# Altium PCB PCB-MAKEY_MAKEY_PTITTEAM_vIN.PcbDoc
Units mil, origin at the board's own origin, x right, y up, seen from the top; angles counter-clockwise.
Board outline 3500 x 1950 mil, 2 copper layers (Top Layer, Bottom Layer); 52 components, 61 nets, 161 pads, 57 vias.
Unrouted connection lines stored in the file: 10.
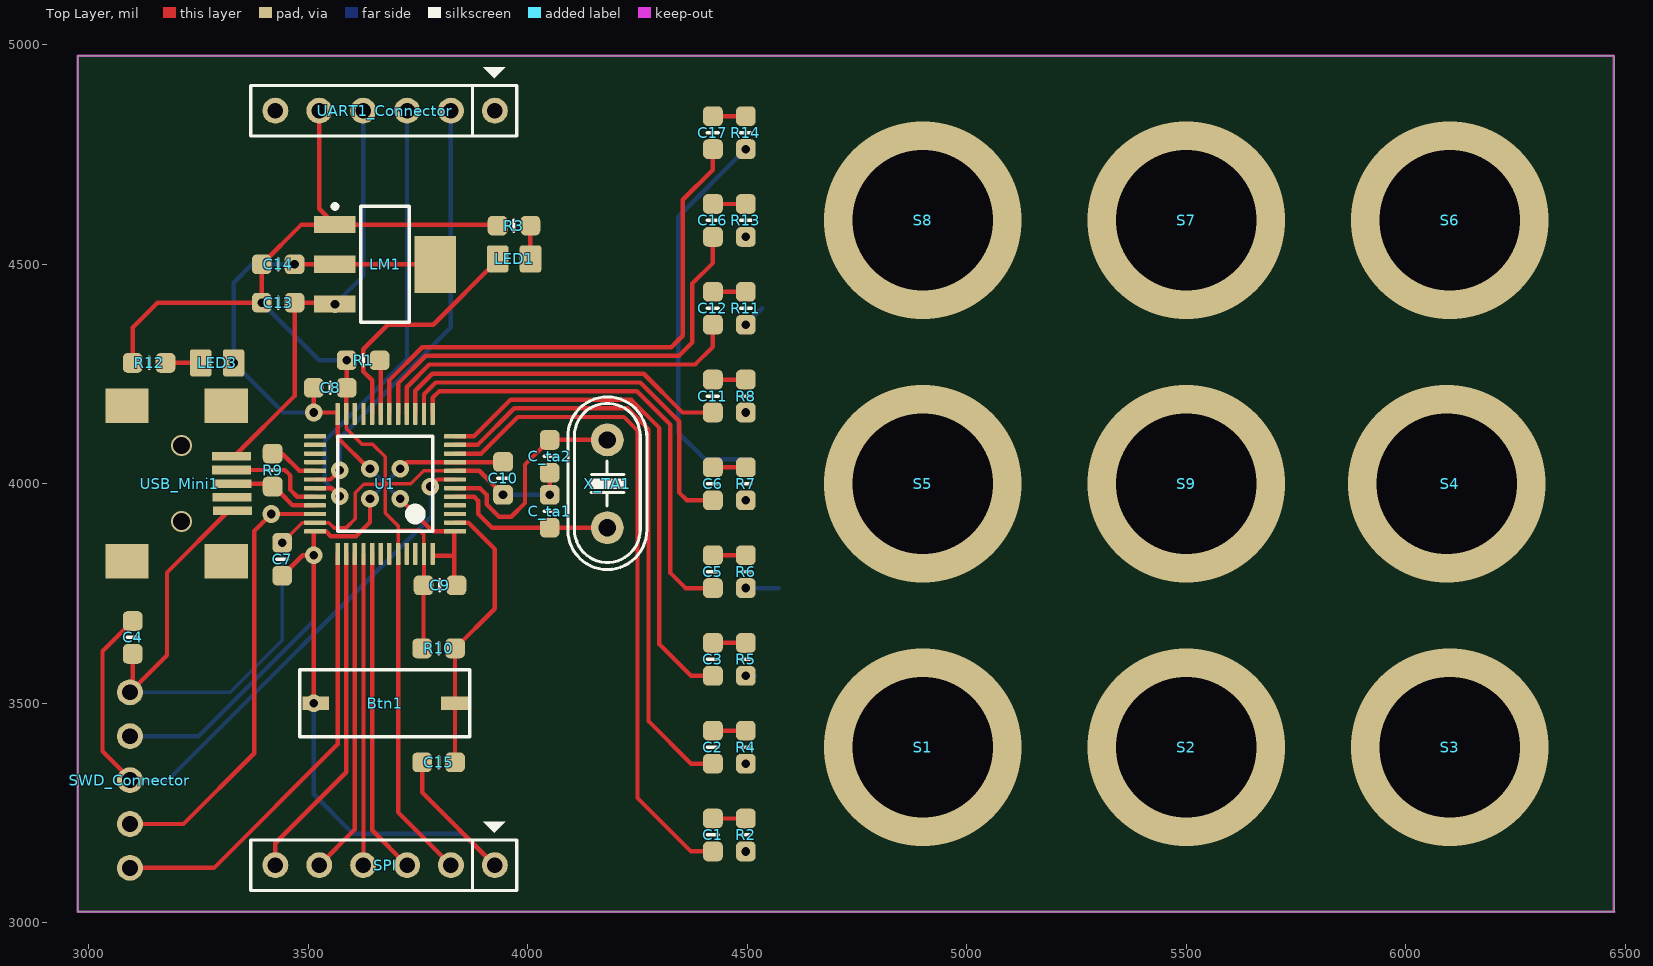
[diagram p0: Top Layer view]
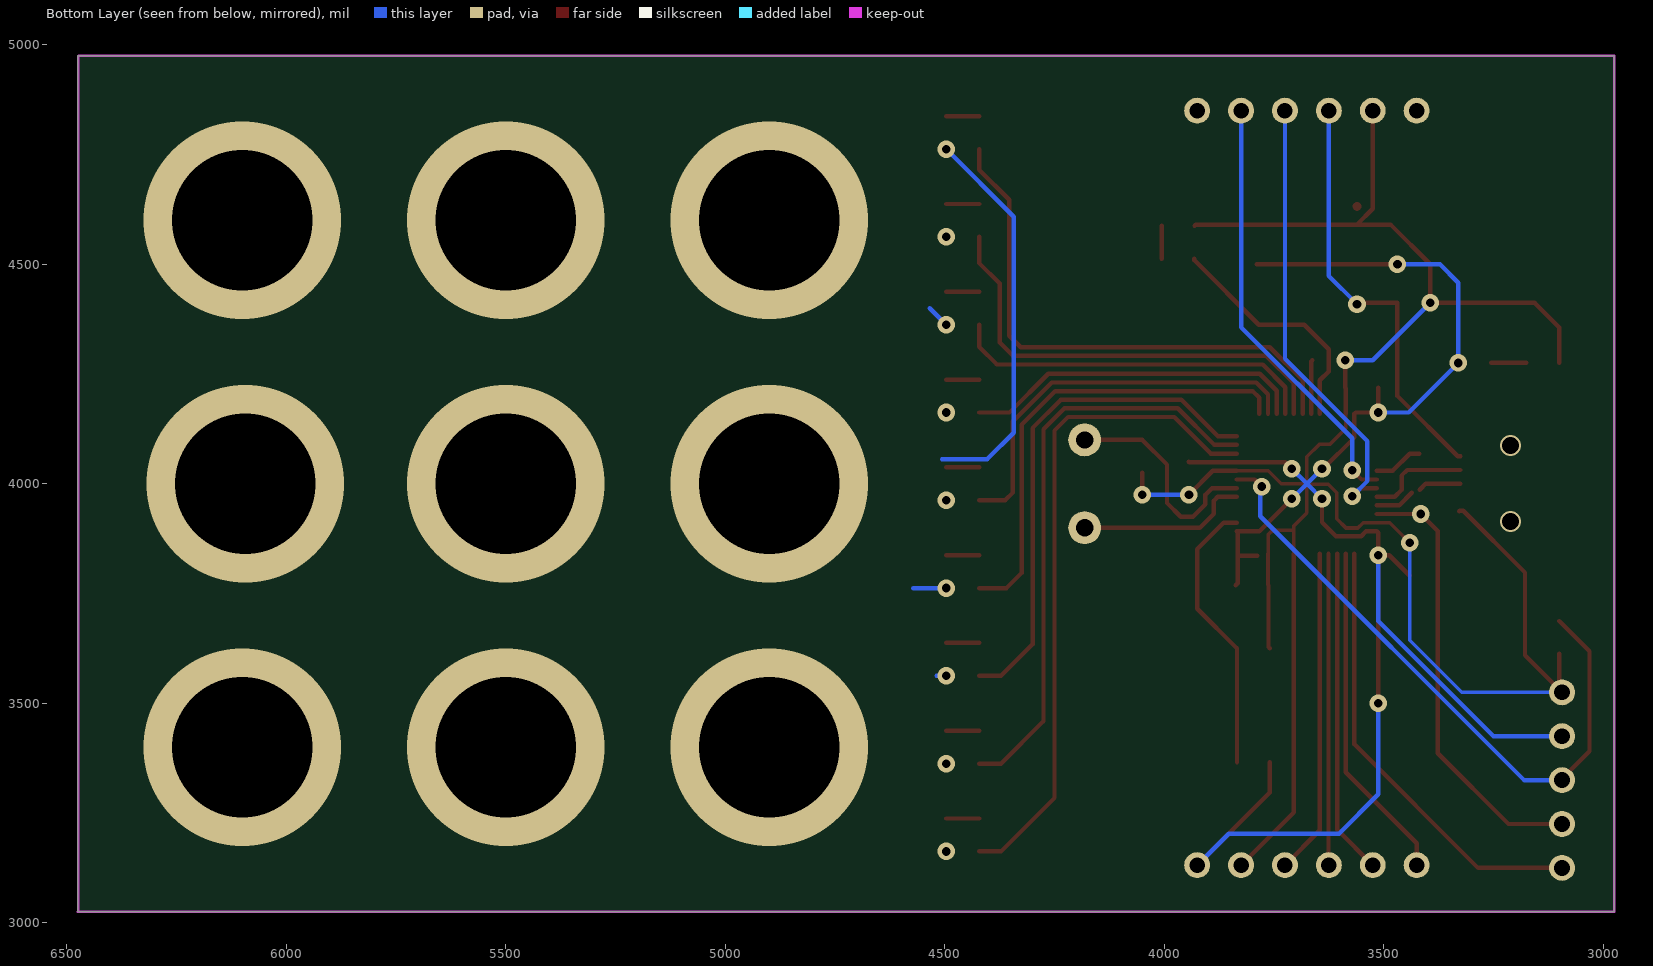
[diagram p1: Bottom Layer view, seen from below]

## Layer stack, top to bottom
Top Solder: solder mask 0.4, Solder Resist, Dk 3.5
Top Layer: signal copper 1.4
Dielectric1: dielectric 12.6, FR-4, Dk 4.8
Bottom Layer: signal copper 1.4
Bottom Solder: solder mask 0.4, Solder Resist, Dk 3.5

## Board outline
2975,3025 2975,4975 6475,4975 6475,3050 6475,3025 2975,3025

## Design rules (kind name [scope] priority, off if disabled: settings)
Clearance [All] p1: gap=9.68
PolygonConnect [All] p1: connectstyle=Relief reliefconductorwidth=10 reliefentries=4 polygonreliefangle="90 Angle" airgapwidth=10
RoutingVias [All] p1: holewidth=28 width=50 viastyle="Through Hole" minholewidth=28 minwidth=50 maxholewidth=28 maxwidth=50
SolderMaskExpansion [All] p1: expansion=4
Width [All] p1: maxlimit=100 minlimit=8 preferedwidth=10
30 further rules are at their usual default settings.

## Components (designator, comment, footprint, x,y, rotation, side; value= is the part's Value field where it differs from the comment)
Btn1 "Function" Button_SMD_2pin 3675,3500 r180 top
C1 "104" CAP-0603 4421.87,3200 r90 top
C2 "104" CAP-0603 4421.87,3400 r90 top
C3 "104" CAP-0603 4421.87,3600 r90 top
C4 "104" CAP-0603 3100,3650 r270 top
C5 "104" CAP-0603 4421.87,3800 r90 top
C6 "104" CAP-0603 4421.87,4000 r90 top
C7 "1uF" CAP-0603 3440.62,3828.12 r270 top
C8 "1uF" CAP-0603 3550,4218.75 r0 top
C9 "1uF" CAP-0603 3800,3768.75 r0 top
C10 "1uF" CAP-0603 3943.75,4012.5 r270 top
C11 "104" CAP-0603 4421.87,4200 r90 top
C12 "104" CAP-0603 4421.87,4400 r90 top
C13 "104" CAP-0603 3431.25,4412.5 r0 top
C14 "104" CAP-0603 3431.25,4500 r0 top
C15 "104" CAP-0603 3796.88,3365.62 r180 top
C16 "104" CAP-0603 4421.87,4600 r90 top
C17 "104" CAP-0603 4421.88,4800 r90 top
C_ta1 "22pF" CAP-0603 4050,3937.5 r90 top
C_ta2 "22pF" CAP-0603 4050,4062.5 r270 top
LED1 "color" LED-0805 3968.75,4512.5 r0 top
LED3 "color" LED-0805 3292.44,4275.35 r180 top
LM1 "LM1117" SOT223-4N 3675,4500 r0 top
R1 "0R" RES-0603 3625,4281.25 r0 top
R2 "0R" RES-0603 4496.87,3200 r270 top
R3 "1k2" RES-0603 3968.5,4588 r0 top
R4 "0R" RES-0603 4496.87,3400 r270 top
R5 "0R" RES-0603 4496.87,3600 r270 top
R6 "0R" RES-0603 4496.87,3800 r270 top
R7 "0R" RES-0603 4496.87,4000 r270 top
R8 "0R" RES-0603 4496.87,4200 r270 top
R9 "1k5" RES-0603 3418.75,4031.25 r90 top
R10 "10k" RES-0603 3796.88,3625 r0 top
R11 "0R" RES-0603 4496.87,4400 r270 top
R12 "1k2" RES-0603 3137.44,4275.35 r0 top
R13 "0R" RES-0603 4496.87,4600 r270 top
R14 "0R" RES-0603 4496.88,4800 r270 top
S1 "C_Sensor" SOP2 4900,3400 r90 top
S2 "C_Sensor" SOP2 5500,3400 r90 top
S3 "C_Sensor" SOP2 6100,3400 r90 top
S4 "C_Sensor" SOP2 6100,4000 r90 top
S5 "C_Sensor" SOP2 4900,4000 r90 top
S6 "C_Sensor" SOP2 6100,4600 r270 top
S7 "C_Sensor" SOP2 5500,4600 r90 top
S8 "C_Sensor" SOP2 4900,4600 r90 top
S9 "C_Sensor" SOP2 5500,4000 r90 top locked
SPI "" JP6 3925,3131.25 r180 top
SWD_Connector "" JP_5 3093.75,3325 r90 top
U1 "STM32F103C8T6" LQFP48_N 3675,4000 r180 top locked
UART1_Connector "Connector" JP6 3925,4850 r180 top
USB_Mini1 "" Micro_USB 3325,4062.5 r270 top
X_TA1 "8Mhz" XT2 4181.25,4000 r270 top

## Footprints (in the part's own frame and the unit in brackets; to place one, negate y for a bottom-side part, rotate by r counter-clockwise, add the part's x,y. Pads: shape width x height; smd on the part's side, far side on the other; paste and mask are expansions set on the pad)
Button_SMD_2pin [mm] "Button smd 2pin"
  rect 1.55x0.8 smd: 1(-4.013,0) 2(4.013,0)
  silkscreen extent -4.9,-1.93 4.93,1.93, body extent -4.05,-1.8 3.95,1.8, height 2.53
CAP-0603 [mil] "Chip Capacitor; Body 2 x 1.2 mm (LxW typ)"
  rrect50% 45x45 smd: 1(-37.5,0) 2(37.5,0)
  silkscreen extent 0,-12 0,13, body extent -39,-24 39,24, height 28
JP6 [mm] "JP6"
  round 1.5 hole 0.9: 1(0,0) 2(2.54,0) 3(5.08,0) 4(7.62,0) 5(10.16,0) 6(12.7,0)
  silkscreen extent -1.27,-2.51 14.12,1.47, body extent -1.22,-1.27 13.92,1.23, height 8.22
JP_5 [mm]
  round 1.5 hole 0.914: 1(-5.08,0) 2(-2.54,0) 3(0,0) 4(2.54,0) 5(5.08,0)
  body extent -6.3,-1.36 6.3,1.14, height 8.22
LED-0805 [mil] "Chip LED; Body 2 x 1.2 mm (LxW typ)"
  rrect25% 49.27x61.77 smd: 1(-37.5,0) 2(37.5,0)
  body extent -39,-25 39,25, height 31
LQFP48_N [mm] "Thin QFP, 48-Leads, Body 7x7mm, Pitch 0.5mm, IPC Medium Density"
  rrect25% 1.27x0.254 smd: 1(-4.05,2.75) 2(-4.05,2.25) 3(-4.05,1.75) 4(-4.05,1.25) 5(-4.05,0.75) 6(-4.05,0.25) 7(-4.05,-0.25) 8(-4.05,-0.75) 9(-4.05,-1.25) 10(-4.05,-1.75) 11(-4.05,-2.25) 12(-4.05,-2.75) 25(4.05,-2.75) 26(4.05,-2.25) 27(4.05,-1.75) 28(4.05,-1.25) 29(4.05,-0.75) 30(4.05,-0.25) 31(4.05,0.25) 32(4.05,0.75) 33(4.05,1.25) 34(4.05,1.75) 35(4.05,2.25) 36(4.05,2.75)
  rrect25% 0.254x1.27 smd: 13(-2.75,-4.05) 14(-2.25,-4.05) 15(-1.75,-4.05) 16(-1.25,-4.05) 17(-0.75,-4.05) 18(-0.25,-4.05) 19(0.25,-4.05) 20(0.75,-4.05) 21(1.25,-4.05) 22(1.75,-4.05) 23(2.25,-4.05) 24(2.75,-4.05) 37(2.75,4.05) 38(2.25,4.05) 39(1.75,4.05) 40(1.25,4.05) 41(0.75,4.05) 42(0.25,4.05) 43(-0.25,4.05) 44(-0.75,4.05) 45(-1.25,4.05) 46(-1.75,4.05) 47(-2.25,4.05) 48(-2.75,4.05)
  silkscreen extent -2.75,-2.75 2.75,2.75, body extent -3.5,-3.5 3.5,3.5, height 1.6
Micro_USB [mm] "Micro usb connector"
  rect 2x2.5 smd: 0(-2.929,-6.045) 0(-2.925,-0.305) 0(6.071,-6.045) 0(6.075,-0.305)
  rect 0.5x2.25 smd: 1(0,0) 2(0.787,0.013) 3(1.575,0.025) 4(2.362,0.038) 5(3.15,0.051)
  body extent -3.78,-8.83 6.92,0.37, height 3.95
RES-0603 [mil] "Chip Resistor; Body 2 x 1.2 mm (LxW typ)"
  rrect50% 45x45 smd: 1(-37.5,0) 2(37.5,0)
  silkscreen extent 0,-12 0,12, body extent -39,-24 39,24, height 28
SOP2 [mil]
  round 0 all layers, no hole: 1(0,0)
SOT223-4N [mm]
  rect 2.4x1 smd: 1(-2.9,2.3) 2(-2.9,0) 3(-2.9,-2.3)
  rect 2.4x3.3 smd: 4(2.9,0)
  Top Layer circle w0.25: c-2.9,3.35 r0.125
  silkscreen extent -3.02,-3.35 1.4,3.47, body extent -3.39,-3.27 3.5,3.23, height 1.72
XT2 [mm] "Footpin for Crystal 2 pin"
  round 1.905 hole 1: 1(-2.54,0) 2(2.54,0)
  silkscreen extent -5.03,-2.29 4.96,2.29, body extent -5.93,-2.36 5.42,2.29, height 3.5

## Part data
Btn1: library part Button_SMD_2pin, "Switch button 2 pin"
C1 C2 C3 C4 C5 C6 C9 C10 C11 C13 C14 C15: library part CM, "Cap SMD"
C7 C8 C12 C16 C17 C_ta1 C_ta2: library part CN0, "Cremic For Xtal 1pF => 100pF"
LED1 LED3: library part Led_SMD, "Led smd"
LM1: "3v3"
R1 R2 R3 R4 R5 R6 R7 R8 R10 R11 R12 R13 R14: library part Res_SMD_0603, "Resistor smd 0603 type"
R9: library part R, "Resistor 1/4W"
SPI: library part SPI_Connector
SWD_Connector: library part Load_Program
U1: "STM32 ARM-based 32-bit MCU with 64 Kbytes Flash, 48-pin LQFP, Industrial Temperature"
UART1_Connector: library part USB2Com_Conn, "Connector to USB2Com module"
USB_Mini1: library part USB_M
X_TA1: library part XT2, "Crystal For all Crystal 2pin."

## Via types
v1: diameter 40, hole 19.68, Top Layer to Bottom Layer, tented both sides, 28 vias
v2: diameter 220, hole 118.11, Top Layer to Bottom Layer, 18 vias
v3: diameter 450, hole 320, Top Layer to Bottom Layer, tented both sides, 9 vias
v4: diameter 47.24, hole 39.37, Top Layer to Bottom Layer, tented both sides, 2 vias

## Nets (pads, with @x,y where several pads share a name; then routed paths per layer and width w, separated by ;. In a path a pad name is that pad's centre, name@x,y a point inside that pad or via, vN(x,y) a via of type N, cw(c..) or ccw(c..) an arc to the next point about the centre after c; other vN are vias at no path point)
GND: C4.2 C7.1 C8.2 C9.1 C10.2 C13.1 C14.1 C_ta1.2 C_ta2.2 LM1.1 R1.1 R3.1 R10.1 R12.1 SPI.2 SWD_Connector.5 U1.8 U1.23 U1.35 U1.44 U1.47 UART1_Connector.5 USB_Mini1.5 | length 5184.8
  Top Layer w8: C7.1@3438.5,3863.5 v1(3440.62,3865.62) 3486.42,3911.42 U1.35 3547,3911.42 3559.1,3899.32 3585.95,3899.32 3606.95,3920.31 3606.95,3979.58 3626.67,3999.3 3674.3,3999.3 3675,4000 ; U1.23 3586.42,4126.08 3621.88,4090.62 3645.92,4090.62 3675,4061.54 3675,4000 ; 3674.32,4000.68 3675,4000 ; U1.44 3704.53,3893.75 ; U1.47 3763.58,3883.59 3753.42,3893.75 3704.53,3893.75 ; U1.8 3763,4029.53 3733.47,4000 3675,4000 ; 3675,4000 3675,3933.62 3704.53,3904.09 3704.53,3893.75
  Top Layer w10: SWD_Connector.5 SWD_Connector.5@3100,3531.25 ; R12.1 3099.94,4356.19 3156.25,4412.5 v1(3393.75,4412.5) C14.1 3484.3,4590.55 LM1.1 ; C4.2 SWD_Connector.5@3100,3531.25 ; USB_Mini1.5@3328,3937.5 USB_Mini1.5 3318.82,3938.5 3178.12,3797.8 3178.12,3609.38 SWD_Connector.5@3100,3531.25 ; UART1_Connector.5 3525,4626.38 LM1.1 ; U1.23@3586.42,4159.45 3586.42,4217.67 C8.2 v1(3587.5,4281.25) ; U1.44 3704.53,3251.72 SPI.2 ; R10.1 3762.5,3628.13 C9.1 3763.58,3769.83 U1.47 ; U1.8 3889.22,4029.53 v1(3943.75,3975) ; R3.1 3928.45,4590.55 LM1.1 ; v1(4050,3975) C_ta2.2
  Bottom Layer w8: SWD_Connector.5 3322,3525 3440.62,3643.62 v1(3440.62,3865.62)
  Bottom Layer w10: v1(3393.75,4412.5) 3525,4281.25 v1(3587.5,4281.25) ; v1(3943.75,3975) v1(4050,3975)
NetC1_2: C1.2 R2.1 | length 75
  Top Layer w10: C1.2 R2.1
NetC2_2: C2.2 R4.1 | length 75
  Top Layer w10: C2.2 R4.1
NetC3_2: C3.2 R5.1 | length 75
  Top Layer w10: C3.2 R5.1
NetC5_2: C5.2 R6.1 | length 75
  Top Layer w10: C5.2 R6.1
NetC6_2: C6.2 R7.1 | length 75
  Top Layer w10: C6.2 R7.1
NetC11_2: C11.2 R8.1 | length 75
  Top Layer w10: C11.2 R8.1
NetC12_2: C12.2 R11.1 | length 75
  Top Layer w10: C12.2 R11.1
NetC16_2: C16.2 R13.1 | length 75
  Top Layer w10: C16.2 R13.1
NetC17_2: C17.2 R14.1 | length 75
  Top Layer w10: C17.2 R14.1
NetLED1_2: LED1.2 R3.2 | length 75.6
  Top Layer w10: R3.2 4006,4512.75 LED1.2
NetLED3_2: LED3.2 R12.2 | length 80
  Top Layer w10: R12.2 LED3.2
NetR2_2: R2.2 S1.1
  other v1: 4496.87,3162.5
  other v2: 4805,3400 4995,3400
  other v3: 4900,3400
NetR4_2: R4.2 S2.1 | length 3.1
  Bottom Layer w10: v1(4496.87,3362.5) v1@4500,3362.5
  other v2: 5405,3400 5595,3400
  other v3: 5500,3400
NetR5_2: R5.2 S3.1 | length 21.9
  Bottom Layer w10: v1(4496.87,3562.5) 4518.75,3562.5
  other v2: 6005,3400 6195,3400
  other v3: 6100,3400
NetR6_2: R6.2 S4.1 | length 84.4
  Bottom Layer w10: v1(4496.87,3762.5) 4571.88,3762.5 ; v3@5875.68,3990.62 v3@5875.68,4000
  other v2: 6005,4000 6195,4000
  other v3: 6093.75,4000
NetR7_2: R7.2 S5.1
  other v1: 4496.87,3962.5
  other v2: 4805,4000 4995,4000
  other v3: 4900,4000
NetR8_2: R8.2 S6.1
  other v1: 4496.87,4162.5
  other v2: 6005,4600 6195,4600
  other v3: 6100,4600
NetR11_2: R11.2 S7.1 | length 53
  Bottom Layer w10: v1(4496.87,4362.5) 4534.37,4400
  other v2: 5405,4600 5595,4600
  other v3: 5500,4600
NetR13_2: R13.2 S8.1 | length 7.6
  Bottom Layer w10: v1(4496.87,4562.5) v1@4504.5,4562.5
  other v2: 4805,4600 4995,4600
  other v3: 4900,4600
NetR14_2: R14.2 S9.1 | length 898
  Bottom Layer w10: v1(4496.88,4762.5) 4343,4608.62 4343,4116.38 4403.12,4056.25 4506.25,4056.25
  other v2: 5405,4000 5595,4000
  other v3: 5500,4000
NRST: C4.1 SWD_Connector.3 U1.7 | length 1485.6
  Top Layer w10: SWD_Connector.3 3093.75,3328.12 3031.25,3390.62 3031.25,3618.75 C4.1 ; v1(3778.12,3993.75) 3794.22,4009.84 U1.7
  Bottom Layer w10: SWD_Connector.3 3180.29,3325 3781.55,3926.26 3781.55,3990.32 v1(3778.12,3993.75)
OSC_IN: C_ta1.1 U1.5 X_TA1.2 | length 393.4
  Top Layer w10: U1.5 3878,3970.47 3886.89,3961.58 3886.89,3931.86 3918.75,3900 C_ta1.1 X_TA1.2
OSC_OUT: C_ta2.1 U1.6 X_TA1.1 | length 510.2
  Top Layer w10: U1.6 3891.09,3990.16 3906.57,3974.68 3906.57,3953.01 3934.58,3925 3962.5,3925 3993.75,3956.25 3993.75,4043.75 C_ta2.1 X_TA1.1
PA0: C1.1 U1.10 | length 1522.1
  Top Layer w10: U1.10 3893.9,4068.9 3977.18,4152.18 4219.08,4152.18 4250,4121.26 4250,3284.37 4371.87,3162.5 C1.1
PA1: C2.1 U1.11 | length 1346.5
  Top Layer w10: U1.11 3885.75,4088.58 3969.03,4171.86 4227.23,4171.86 4275,4124.09 4275,3459.37 4371.87,3362.5 C2.1
PA2: C3.1 U1.12 | length 1171
  Top Layer w10: U1.12 3877.6,4108.27 3960.88,4191.54 4235.38,4191.54 4300,4126.92 4300,3634.37 4371.87,3562.5 C3.1
PA3: C5.1 U1.13 | length 1064.9
  Top Layer w10: U1.13 3783.27,4195.79 3798.7,4211.22 4248.15,4211.22 4325,4134.38 4325,3796.88 4359.38,3762.5 C5.1
PA4: C6.1 U1.14 | length 920.1
  Top Layer w10: U1.14@3763.59,4159.45 3763.59,4203.94 3790.55,4230.9 4256.31,4230.9 4344.68,4142.53 4344.68,3980.32 4362.5,3962.5 C6.1
PA5: C11.1 U1.15 | length 783
  Top Layer w10: U1.15 3743.9,4212.08 3782.4,4250.58 4264.46,4250.58 4352.54,4162.5 C11.1
PA6: C12.1 U1.16 | length 846.7
  Top Layer w10: U1.16@3724.22,4159.45 3724.22,4220.23 3775.86,4271.88 4381.25,4271.88 4421.87,4312.5 C12.1
PA7: C16.1 U1.17 | length 1038.2
  Top Layer w10: U1.17 3704.53,4228.38 3767.71,4291.56 4344.68,4291.56 4375,4321.88 4375,4456.25 4421.87,4503.12 C16.1
PA13: SWD_Connector.2 U1.34 | length 1011
  Top Layer w10: SWD_Connector.2 3215.62,3225 3376.89,3386.27 3376.89,3892.52 v1(3415.62,3931.25) 3415.77,3931.11 U1.34@3515.55,3931.11
PA14: SWD_Connector.1 U1.37 | length 1023.5
  Top Layer w10: SWD_Connector.1 3285,3125 3566.73,3406.73 U1.37
PA15: SPI.6 U1.38 | length 776.2
  Top Layer w10: SPI.6 3425,3181.25 3586.42,3342.67 U1.38
PB0: C17.1 U1.18 | length 1240.7
  Top Layer w10: U1.18 3684.85,4236.52 3759.56,4311.23 4326.86,4311.23 4353.12,4337.5 4353.12,4646.88 4421.88,4715.62 C17.1
PB1: R1.2 U1.19 | length 122.9
  Top Layer w10: R1.2 3665.15,4278.6 U1.19@3665.15,4159.45
PB2: LED1.1 U1.20 | length 548.7
  Top Layer w10: U1.20 3645.47,4235.78 3625.32,4255.93 3625.32,4306.57 3681.25,4362.5 3784.64,4362.5 3931.25,4509.11 LED1.1
PB3: SPI.5 U1.39 | length 742.9
  Top Layer w10: SPI.5 3606.1,3212.35 U1.39
PB4: SPI.4 U1.40 | length 709.6
  Top Layer w10: SPI.4 3625.79,3132.04 U1.40
PB5: SPI.3 U1.41 | length 742.2
  Top Layer w10: U1.41 3645.47,3210.78 SPI.3
PB6: U1.42
PB7: U1.43
PB8: U1.45
PB9: U1.46
PB10: U1.21
PB11: U1.22
PB12: U1.25
PB13: U1.26
PB14: U1.27
PB15: U1.28
PC13: Btn1.1 C15.1 R10.2 U1.2 | length 638.6
  Top Layer w10: C15.1 R10.2 3925,3715.63 3925,3851.21 3864.79,3911.42 U1.2
PC14: U1.3
PC15: U1.4
USART1_RX: U1.31 UART1_Connector.3 | length 1034.2
  Top Layer w10: U1.31 3553.59,3990.16 v1(3571.88,3971.88)
  Bottom Layer w10: v1(3571.88,3971.88) 3537.2,4006.55 3537.2,4096.87 3725,4284.67 UART1_Connector.3
USART1_TX: U1.30 UART1_Connector.2 | length 988.8
  Top Layer w10: U1.30 3550.47,4009.84 v1(3571.88,4031.25)
  Bottom Layer w10: v1(3571.88,4031.25) 3571.88,4103.71 3825,4356.84 UART1_Connector.2
USB_5V: C13.2 LM1.3 UART1_Connector.4 USB_Mini1.1 | length 973.7
  Top Layer w10: USB_Mini1.1 3331.25,4062.5 3468.75,4200 C13.2 3557.78,4412.5 v1(3560.83,4409.45)
  Bottom Layer w10: v1(3560.83,4409.45) 3625,4473.62 UART1_Connector.4
USB_DISC: R9.2 U1.29 | length 113.1
  Top Layer w10: R9.2 3440.63,4068.75 3479.85,4029.53 3493.75,4029.53 U1.29
USBDM: U1.32 USB_Mini1.2 | length 234.5
  Top Layer w10: USB_Mini1.2 3446.62,4031.5 3459.38,4018.75 3459.38,3986.09 3474.99,3970.47 U1.32
USBDP: R9.1 U1.33 USB_Mini1.3 | length 189.2
  Top Layer w10: USB_Mini1.3 3404,4000.5 R9.1@3418,3986.5 ; R9.1@3436,3979.5 3464.71,3950.79 U1.33
VCC: Btn1.2 C7.2 C8.1 C9.2 C10.1 C14.2 C15.2 LED3.1 LM1.2 LM1.4 SPI.1 SWD_Connector.4 U1.1 U1.9 U1.24 U1.36 U1.48 | length 4267.9
  Top Layer w10: C7.2 3487.5,3837.5 v1(3512.5,3837.5) ; v1(3468.75,4500) LM1.2 ; v1(3512.5,3500) v1(3512.5,3837.5) ; C8.1 v1(3512.5,4162.5) 3563.68,4162.5 U1.24 3566.73,4105.74 3638.1,4034.38 v1(3640.62,4034.38) ; LM1.2 LM1.4 ; v1(3640.62,3965.62) 3640.62,3912.5 3608.76,3880.64 3551.36,3880.64 3540.27,3891.73 U1.36 3512.5,3888.68 v1(3512.5,3837.5) ; v1(3709.38,3965.62) 3783.27,3891.73 U1.1 3831.25,3888.53 3832.81,3886.97 3832.81,3835.94 ; v1(3709.38,4034.38) 3724.21,4049.21 U1.9 3942.96,4049.21 C10.1 ; C15.2 3759.38,3296.88 SPI.1 ; U1.48@3787.88,3835.94 3832.81,3835.94 ; C9.2 3832.81,3773.44 3832.81,3835.94
  Bottom Layer w10: SWD_Connector.4 3250,3425 3512.5,3687.5 v1(3512.5,3837.5) ; v1(3468.75,4500) 3371.88,4500 3329.94,4458.07 v1(3329.94,4275.35) 3442.8,4162.5 v1(3512.5,4162.5) ; v1(3512.5,3500) 3512.5,3292.5 3602,3203 3853.25,3203 SPI.1 ; v1(3640.62,3965.62) 3675,4000 ; v1(3640.62,4034.38) 3675,4000 ; v1(3709.38,3965.62) 3675,4000 ; v1(3709.38,4034.38) 3675,4000
pads on no net: UART1_Connector.1 UART1_Connector.6 USB_Mini1.0 USB_Mini1.4
copper on no net:
  other v4: 3211.43,3913.89 3211.43,4087.11

## Keep-outs
Keep-Out Layer:
  lines w5: 6473.18,3025 6473.18,4975 2975,4975 2975,3025 6475,3025

## Silkscreen, mask and mechanical layers (free items; w line width, h text height)
Mechanical 15:
  lines w10: 2975,4000 6475,4000